# EAGLE board SFT_MotorBridge (EAGLE 7.2.0)
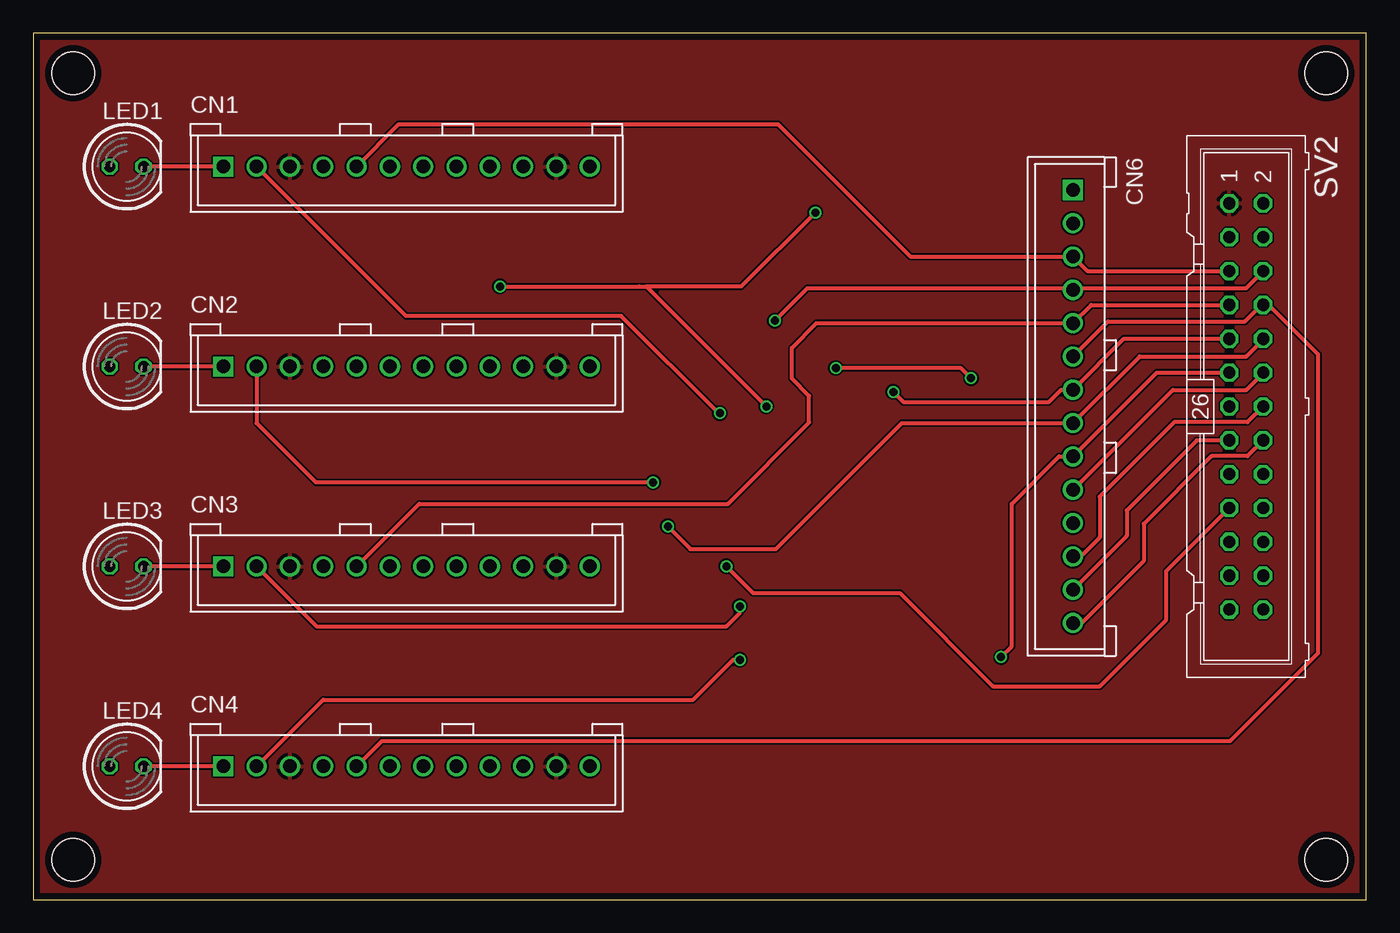
[diagram p0: board, top side]
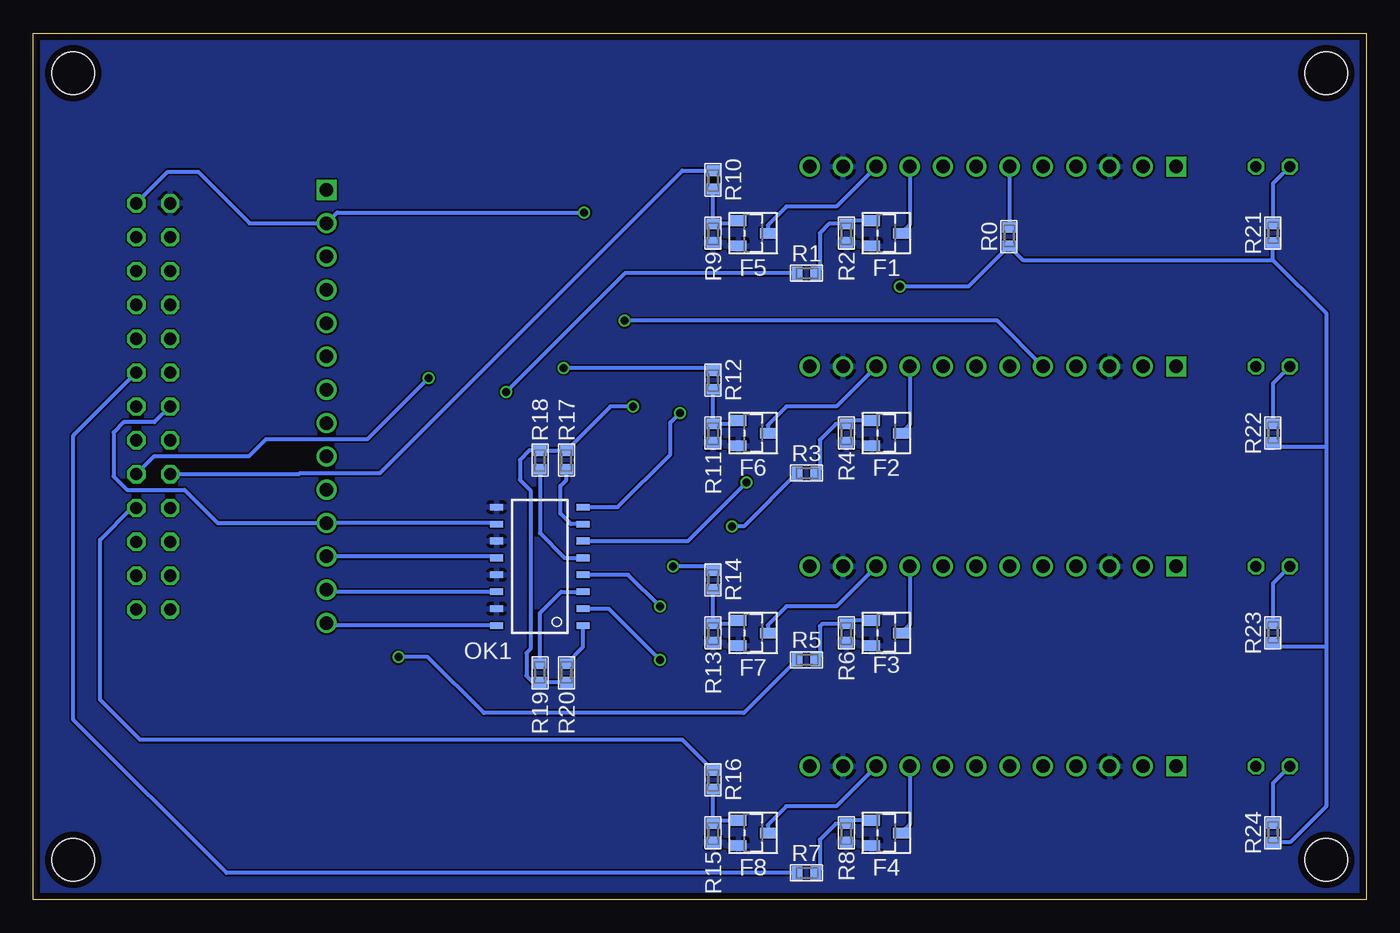
[diagram p1: board, bottom side, seen from below]

Size 100 x 65 mm. Coordinates in mm from the lower left corner, seen from the top.
Outline: 0,0 100,0 100,65 0,65 0,0
Copper layers (1+2*15+16): Top 0.018mm / dielectric 0.25mm / layer 2 0.035mm / dielectric 1mm / layer 15 0.035mm / dielectric 0.25mm / Bottom 0.018mm
Design rules "pban_5mil-l4": minimum track width 5mil, minimum drill 0.3mm, track to track 5mil, track to pad 0.229mm, pad to pad 5mil, via to via 5mil, smd to smd 5mil, copper to edge 0.5mm, drill to drill 0.5mm, minimum pad ring 0.15mm, minimum via ring 0.15mm, stop-mask expansion 4mil, vias tented up to drill 0.35mm, thermal gap 10mil
Holes 3.2 mm at 3,62 3,3 97,3 97,62

## Footprints (pad centres in the part's own frame; a part is rotated, then mirrored left to right if it is on the bottom)
B12B-XASK-1 = drill 1.016 square: 1 -13.75,0 | drill 1.016: 2 -11.25,0; 3 -8.75,0; 4 -6.25,0; 5 -3.75,0; 6 -1.25,0; 7 1.25,0; 8 3.75,0; 9 6.25,0; 10 8.75,0; 11 11.25,0; 12 13.75,0
B14B-XASK-1 = drill 1.016 square: 1 -16.25,0 | drill 1.016: 2 -13.75,0; 3 -11.25,0; 4 -8.75,0; 5 -6.25,0; 6 -3.75,0; 7 -1.25,0; 8 1.25,0; 9 3.75,0; 10 6.25,0; 11 8.75,0; 12 11.25,0; 13 13.75,0; 14 16.25,0
SOT23 = smd 0.8 x 1.2: 1 -0.95,-1.1; 2 0.95,-1.1; 3 0,1.1
LED5MM = drill 0.813 octagon: A -1.27,0; K 1.27,0
MINI-FLAT-16 = smd 1 x 0.5: 1 -3.24,4.445; 2 -3.24,3.175; 3 -3.24,1.905; 4 -3.24,0.635; 5 -3.24,-0.635; 6 -3.24,-1.905; 7 -3.24,-3.175; 8 -3.24,-4.445; 9 3.24,-4.445; 10 3.24,-3.175; 11 3.24,-1.905; 12 3.24,-0.635; 13 3.24,0.635; 14 3.24,1.905; 15 3.24,3.175; 16 3.24,4.445
1608 = smd 0.8 x 1: 1 -0.7,0; 2 0.7,0
ML26 = drill 0.914 octagon: 1 -15.24,-1.27; 2 -15.24,1.27; 3 -12.7,-1.27; 4 -12.7,1.27; 5 -10.16,-1.27; 6 -10.16,1.27; 7 -7.62,-1.27; 8 -7.62,1.27; 9 -5.08,-1.27; 10 -5.08,1.27; 11 -2.54,-1.27; 12 -2.54,1.27; 13 0,-1.27; 14 0,1.27; 15 2.54,-1.27; 16 2.54,1.27; 17 5.08,-1.27; 18 5.08,1.27; 19 7.62,-1.27; 20 7.62,1.27; 21 10.16,-1.27; 22 10.16,1.27; 23 12.7,-1.27; 24 12.7,1.27; 25 15.24,-1.27; 26 15.24,1.27

## Placement (x,y rotation side)
CN1  [B12B-XASK-1]  28,55 0 top
CN2  [B12B-XASK-1]  28,40 0 top
CN3  [B12B-XASK-1]  28,25 0 top
CN4  [B12B-XASK-1]  28,10 0 top
CN6  [B14B-XASK-1]  78,37 270 top
DRILEGEND  [DRILEGEND]  25.22,-46.94 0 top  (outside the outline)
F1  CHIP_FET  [SOT23]  36,50 270 bottom
F2  CHIP_FET  [SOT23]  36,35 270 bottom
F3  CHIP_FET  [SOT23]  36,20 270 bottom
F4  CHIP_FET  [SOT23]  36,5 270 bottom
F5  CHIP_FET  [SOT23]  46,50 270 bottom
F6  CHIP_FET  [SOT23]  46,35 270 bottom
F7  CHIP_FET  [SOT23]  46,20 270 bottom
F8  CHIP_FET  [SOT23]  46,5 270 bottom
LED1  [LED5MM]  7,55 0 top
LED2  [LED5MM]  7,40 0 top
LED3  [LED5MM]  7,25 0 top
LED4  [LED5MM]  7,10 0 top
OK1  TLP283-4  [MINI-FLAT-16]  62,25 180 bottom
R0  [1608]  26.8,49.74 270 bottom
R1  [1608]  42,47 180 bottom
R2  [1608]  39,50 90 bottom
R3  [1608]  42,32 180 bottom
R4  [1608]  39,35 90 bottom
R5  [1608]  42,18 180 bottom
R6  [1608]  39,20 90 bottom
R7  [1608]  42,2 180 bottom
R8  [1608]  39,5 90 bottom
R9  [1608]  49,50 90 bottom
R10  [1608]  49,54 90 bottom
R11  [1608]  49,35 90 bottom
R12  [1608]  49,39 90 bottom
R13  [1608]  49,20 90 bottom
R14  [1608]  49,24 90 bottom
R15  [1608]  49,5 90 bottom
R16  [1608]  49,9 90 bottom
R17  [1608]  60,33 90 bottom
R18  [1608]  62,33 90 bottom
R19  [1608]  62,17 270 bottom
R20  [1608]  60,17 270 bottom
R21  [1608]  7,50 270 bottom
R22  [1608]  7,35 270 bottom
R23  [1608]  7,20 270 bottom
R24  [1608]  7,5 270 bottom
SV2  [ML26]  91,37 270 top

## Library data of the parts
CN1-CN4 CN6 = jst-xa
DRILEGEND = drilegend
F1-F8 = 06_FET
LED1-LED4 = led
OK1 = optocoupler; OC_FARNELL: unknown; OC_NEWARK: unknown
R0 R1-R24 = 01_R
SV2 = con-ml; OC_FARNELL: unknown; OC_NEWARK: unknown

## Nets
+5V: CN6.2 R0.2 R17.2 R18.2 R19.2 R20.2 R21.2 R22.2 R23.2 R24.2 SV2.2
ALARM_1: CN1.1 LED1.K
ALARM_2: CN2.1 LED2.K
ALARM_3: CN3.1 LED3.K
ALARM_4: CN4.1 LED4.K
ALARM_RESET_1: CN1.7
ALARM_RESET_2: CN2.7
ALARM_RESET_3: CN3.7
ALARM_RESET_4: CN4.7
CW_CCW_1: CN1.9 F1.3
CW_CCW_2: CN2.9 F2.3
CW_CCW_3: CN3.9 F3.3
CW_CCW_4: CN4.9 F4.3
CW_CCW_IN_1: CN6.7 R1.2 SV2.9
CW_CCW_IN_2: CN6.8 R3.2 SV2.10
CW_CCW_IN_3: CN6.9 R5.2 SV2.11
CW_CCW_IN_4: CN6.10 R7.2 SV2.12
GND: CN1.3 CN1.11 CN2.3 CN2.11 CN3.3 CN3.11 CN4.3 CN4.11 F1.2 F2.2 F3.2 F4.2 F5.2 F6.2 F7.2 F8.2 OK1.9 OK1.11 OK1.13 OK1.15 R2.1 R4.1 R6.1 R8.1 R9.1 R11.1 R13.1 R15.1 SV2.1
INT.VR_1: CN1.8
INT.VR_2: CN2.8
INT.VR_3: CN3.8
INT.VR_4: CN4.8
N$1: F1.1 R1.1 R2.2
N$2: F2.1 R3.1 R4.2
N$3: F3.1 R5.1 R6.2
N$4: F4.1 R7.1 R8.2
N$5: OK1.3 R19.1
N$6: OK1.5 R18.1
N$7: OK1.7 R17.1
N$8: OK1.1 R20.1
N$9: F5.1 R9.2 R10.1
N$10: F6.1 R11.2 R12.1
N$11: F7.1 R13.2 R14.1
N$12: F8.1 R15.2 R16.1
N$13: LED1.A R21.1
N$14: LED2.A R22.1
N$15: LED3.A R23.1
N$16: LED4.A R24.1
NC_1: CN1.12
NC_2: CN2.12
NC_3: CN3.12
NC_4: CN4.12
RUN_BRAKE_1: CN1.10 F5.3
RUN_BRAKE_2: CN2.10 F6.3
RUN_BRAKE_3: CN3.10 F7.3
RUN_BRAKE_4: CN4.10 F8.3
RUN_BRAKE_IN_1: R10.2 SV2.17
RUN_BRAKE_IN_2: R12.2 SV2.18
RUN_BRAKE_IN_3: R14.2 SV2.19
RUN_BRAKE_IN_4: R16.2 SV2.20
SPEED_1: CN1.2 OK1.8
SPEED_2: CN2.2 OK1.6
SPEED_3: CN3.2 OK1.4
SPEED_4: CN4.2 OK1.2
SPEED_OUT_1: CN6.11 OK1.10 SV2.13
SPEED_OUT_2: CN6.12 OK1.12 SV2.14
SPEED_OUT_3: CN6.13 OK1.14 SV2.15
SPEED_OUT_4: CN6.14 OK1.16 SV2.16
VLM_1: CN1.5 CN6.3 SV2.5
VLM_2: CN2.5 CN6.4 SV2.6
VLM_3: CN3.5 CN6.5 SV2.7
VLM_4: CN4.5 CN6.6 SV2.8
VRH_1: CN1.6 R0.1
VRH_2: CN2.6
VRH_3: CN3.6
VRH_4: CN4.6
VRL_1: CN1.4
VRL_2: CN2.4
VRL_3: CN3.4
VRL_4: CN4.4

## Tracks (layer width: path | path; a pad name or v marks a point on that pad's centre or on a via)
+5V  (via drill 0.6)
  Top 0.3: v35,46 45.47,46 46,46 | 46,46 v55,37 | v58.67,51.56 53.11,46 46,46
  Bottom 0.3: R20.2 R19.2 62.5,16.3 63,16.8 63,18.5 62.7,18.8 62.7,30.7 63.5,31.5 63.5,33 62.8,33.7 R18.2 R17.2 56.7,37 v55,37 | 7,48 25.76,48 R0.2 29.83,46 v35,46 | 7,48 R21.2 | 7,48 3,44 3,34 | 3,34 3,19 | 3,19 3,7 5.7,4.3 R24.2 | R23.2 6.7,19 3,19 | R22.2 6.7,34 3,34 | SV2.2 89.9,54.61 87.63,54.61 83.77,50.75 CN6.2 77.19,51.56 v58.67,51.56
ALARM_1
  Top 0.3: CN1.1 LED1.K
ALARM_2
  Top 0.3: CN2.1 LED2.K
ALARM_3
  Top 0.3: CN3.1 LED3.K
ALARM_4
  Top 0.3: CN4.1 LED4.K
CW_CCW_1
  Bottom 0.3: CN1.9 34.25,50.65 F1.3
CW_CCW_2
  Bottom 0.3: CN2.9 34.25,35.65 F2.3
CW_CCW_3
  Bottom 0.3: CN3.9 34.25,20.65 F3.3
CW_CCW_4
  Bottom 0.3: CN4.9 34.25,5.65 F4.3
CW_CCW_IN_1  (via drill 0.6)
  Top 0.3: SV2.9 81.83,42.08 CN6.7 77.11,38.25 76.2,37.34 65.28,37.34 v64.52,38.1
  Bottom 0.3: R1.2 55.62,47 v64.52,38.1
CW_CCW_IN_2  (via drill 0.6)
  Top 0.3: SV2.10 92.27,42.02 91,40.75 83,40.75 CN6.8 65.15,35.75 55.7,26.3 49.3,26.3 v47.6,28
  Bottom 0.3: R3.2 46.7,28 v47.6,28
CW_CCW_IN_3  (via drill 0.6)
  Top 0.3: SV2.11 84.29,39.54 CN6.9 76.95,33.25 73.4,29.7 73.4,19 v72.6,18.2
  Bottom 0.3: R5.2 46.7,14 66.2,14 70.4,18.2 v72.6,18.2
CW_CCW_IN_4
  Top 0.3: CN6.10 85.5,38.25 91,38.25 92.27,39.52 SV2.12
  Bottom 0.3: R7.2 85.5,2 97,13.5 97,34.81 SV2.12
GND
  pour Bottom: 0,65 100,65 100,0 0,0
  pour Top: 0,65 100,65 100,0 0,0
N$1
  Bottom 0.3: F1.1 38.75,50.95 R2.2 40.3,50.7 41,50 41,47.3 R1.1
N$2
  Bottom 0.3: F2.1 38.75,35.95 R4.2 39.8,35.7 41,34.5 41,32.3 R3.1
N$3
  Bottom 0.3: F3.1 38.75,20.95 R6.2 40.8,20.7 41,20.5 41,18.3 R5.1
N$4
  Bottom 0.3: F4.1 38.75,5.95 R8.2 39.8,5.7 41,4.5 41,2.3 R7.1
N$5
  Bottom 0.3: R19.1 62,21.5 60.41,23.09 OK1.3
N$6
  Bottom 0.3: R18.1 62,27.5 60.13,25.64 OK1.5
N$7
  Bottom 0.3: OK1.7 59.67,28.18 60.45,28.96 60.45,31.05 60,31.5 R17.1
N$8
  Bottom 0.3: R20.1 58.76,18.94 OK1.1
N$9
  Bottom 0.3: F5.1 47.35,50.7 R9.2 R10.1
N$10
  Bottom 0.3: F6.1 47.35,35.7 R11.2 R12.1
N$11
  Bottom 0.3: F7.1 47.35,20.7 R13.2 R14.1
N$12
  Bottom 0.3: F8.1 48.75,5.95 R15.2 R16.1
N$13
  Bottom 0.3: LED1.A 7,53.73 R21.1
N$14
  Bottom 0.3: LED2.A 7,38.73 R22.1
N$15
  Bottom 0.3: LED3.A 7,23.73 R23.1
N$16
  Bottom 0.3: LED4.A 7,8.73 R24.1
RUN_BRAKE_1
  Bottom 0.3: CN1.10 39.75,52 43.5,52 44.9,50.6 F5.3
RUN_BRAKE_2
  Bottom 0.3: CN2.10 39.75,37 43.5,37 44.9,35.6 F6.3
RUN_BRAKE_3
  Bottom 0.3: CN3.10 39.75,22 43.5,22 44.9,20.6 F7.3
RUN_BRAKE_4
  Bottom 0.3: CN4.10 39.75,7 43.5,7 44.9,5.6 F8.3
RUN_BRAKE_IN_1
  Bottom 0.3: SV2.17 80.08,31.92 80,32 74,32 51.3,54.7 R10.2
RUN_BRAKE_IN_2  (via drill 0.6)
  Top 0.3: v70.36,39.12 69.6,39.88 v60.21,39.88
  Bottom 0.3: SV2.18 90.92,33.27 83.82,33.27 82.55,34.54 74.93,34.54 v70.36,39.12 | R12.2 49.18,39.88 v60.21,39.88
RUN_BRAKE_IN_3  (via drill 0.6)
  Top 0.3: v52,25 54,23 65,23 72,16 80,16 85,21 85,24.65 SV2.19
  Bottom 0.3: R14.2 49.3,25 v52,25
RUN_BRAKE_IN_4
  Bottom 0.3: R16.2 51.3,12 92,12 95,15 95,27 92.62,29.38 SV2.20
SPEED_1  (via drill 0.6)
  Top 0.3: v51.5,36.5 51.4,36.5 44.1,43.8 27.95,43.8 CN1.2
  Bottom 0.3: OK1.8 56.16,29.45 52.2,33.4 52.2,35.8 v51.5,36.5
SPEED_2  (via drill 0.6)
  Top 0.3: CN2.2 16.75,35.75 21.2,31.3 v46.5,31.3
  Bottom 0.3: OK1.6 50.9,26.91 v46.5,31.3
SPEED_3  (via drill 0.6)
  Top 0.3: CN3.2 21.25,20.5 52,20.5 53,21.5 v53,22
  Bottom 0.3: v53,22 55.37,24.36 OK1.4
SPEED_4  (via drill 0.6)
  Top 0.3: CN4.2 21.75,15 49.5,15 52.5,18 v53,18
  Bottom 0.3: v53,18 56.83,21.82 OK1.2
SPEED_OUT_1
  Bottom 0.3: OK1.10 65.31,28.25 CN6.11 86.16,28.25 88.65,30.73 92.96,30.73 93.98,31.75 93.98,35.05 93.22,35.81 90.92,35.81 SV2.13
SPEED_OUT_2
  Top 0.3: SV2.14 91.08,35.81 85.6,35.81 80.01,30.23 80.01,27.18 78.58,25.75 CN6.12
  Bottom 0.3: OK1.12 65.36,25.75 CN6.12
SPEED_OUT_3
  Top 0.3: SV2.15 87.29,34.46 82.04,29.21 82.04,27.29 CN6.13
  Bottom 0.3: OK1.14 77.84,23.09 CN6.13
SPEED_OUT_4
  Top 0.3: SV2.16 91.08,33.27 88.39,33.27 83.31,28.19 83.31,25.4 78.66,20.75 CN6.14
  Bottom 0.3: OK1.16 77.81,20.55 CN6.14
VLM_1
  Top 0.3: SV2.5 79.09,47.16 CN6.3 65.8,48.25 55.88,58.17 27.42,58.17 CN1.5
VLM_2  (via drill 0.6)
  Top 0.3: CN6.4 78.12,45.88 | 78.12,45.88 91,45.88 92.27,47.15 SV2.6 | v55.63,43.43 58.07,45.88 78.12,45.88
  Bottom 0.3: CN2.5 27.68,43.43 v55.63,43.43
VLM_3
  Top 0.3: SV2.7 79.37,44.62 CN6.5 58.75,43.25 56.9,41.4 56.9,39.1 58.2,37.8 58.2,35.8 52.1,29.7 28.95,29.7 CN3.5
VLM_4
  Top 0.3: CN6.6 80.62,43.38 90.88,43.38 92.12,44.62 SV2.8 92.68,44.62 96.4,40.9 96.4,18.5 89.8,11.9 26.15,11.9 CN4.5
VRH_1
  Bottom 0.3: R0.1 26.75,50.48 CN1.6

## Text on the board
DrillLegend_01-20: 穴図